# EAGLE board TrunkBus8 (EAGLE 7.5.0)
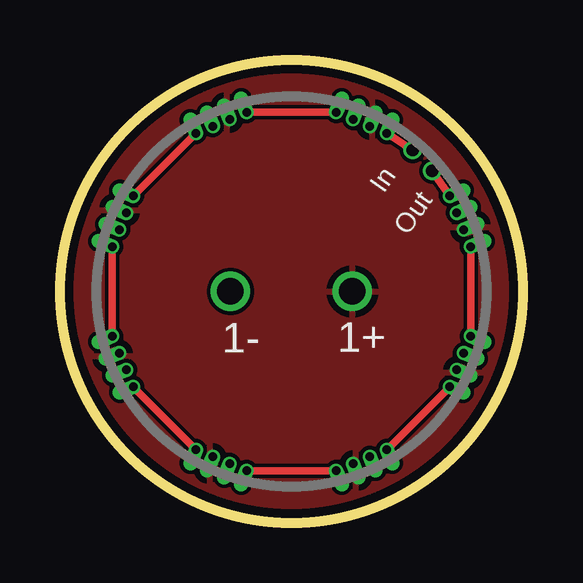
[diagram p0: board, top side]
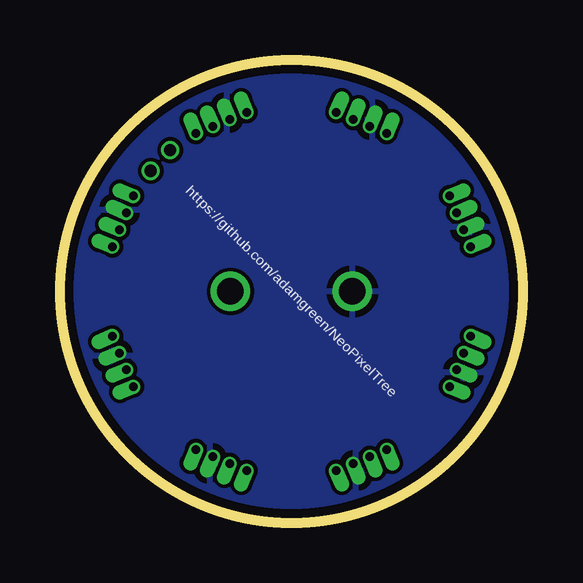
[diagram p1: board, bottom side, seen from below]

Size 19.3 x 19.3 mm. Coordinates in mm from the lower left corner, seen from the top.
Outline: circle at 9.65,9.65 radius 9.65
Copper layers (1*16): Top 0.035559375mm / dielectric 1.6mm / Bottom 0.035559375mm
Design rules "oshpark-2layer": minimum track width 6mil, minimum drill 10mil, track to track 6mil, track to pad 6mil, pad to pad 6mil, via to via 6mil, smd to smd 6mil, copper to edge 15mil, drill to drill 6mil, minimum pad ring 5mil, minimum via ring 5mil, stop-mask expansion 2.5mil, vias tented up to drill 0mil, thermal gap 10mil

## Footprints (pad centres in the part's own frame; a part is rotated, then mirrored left to right if it is on the bottom)
NEOPIXEL_TRUNK_2WIRE = drill 1.1: P$1 -2.54,0; P$2 2.54,0
NEOPIXEL_BRANCH_4WIRE = drill 0.356 pad 0.61 offset: P$1 -0.381,0; P$2 0.381,0; P$3 -1.143,0; P$4 1.143,0
NEOPIXEL_26AWG_HOLE = drill 0.508: P$1 0,0

## Placement (x,y rotation side)
E$1  [NEOPIXEL_TRUNK_2WIRE]  9.65,9.65 180 top
E$2  [NEOPIXEL_BRANCH_4WIRE]  16.69,12.57 112.5 top
E$3  [NEOPIXEL_BRANCH_4WIRE]  12.57,16.69 157.5 top
E$4  [NEOPIXEL_BRANCH_4WIRE]  6.73,16.69 202.5 top
E$5  [NEOPIXEL_BRANCH_4WIRE]  2.62,12.57 247.5 top
E$6  [NEOPIXEL_BRANCH_4WIRE]  2.62,6.73 292.5 top
E$7  [NEOPIXEL_BRANCH_4WIRE]  6.73,2.62 337.5 top
E$8  [NEOPIXEL_BRANCH_4WIRE]  12.57,2.62 22.5 top
E$10  [NEOPIXEL_BRANCH_4WIRE]  16.69,6.73 67.5 top
E$12  [NEOPIXEL_26AWG_HOLE]  15.52,14.68 0 top
E$13  [NEOPIXEL_26AWG_HOLE]  14.71,15.54 0 top

## Library data of the parts
E$1-E$8 E$10 E$12 E$13 = adam_custom

## Nets
5V: E$1.P$1 E$2.P$1 E$3.P$1 E$4.P$1 E$5.P$1 E$6.P$1 E$7.P$1 E$8.P$1 E$10.P$1
GND: E$1.P$2 E$2.P$2 E$3.P$2 E$4.P$2 E$5.P$2 E$6.P$2 E$7.P$2 E$8.P$2 E$10.P$2
S$1: E$8.P$4 E$10.P$3
S$3: E$2.P$4 E$12.P$1
S$4: E$3.P$3 E$13.P$1
S$5: E$3.P$4 E$4.P$3
S$6: E$4.P$4 E$5.P$3
S$7: E$5.P$4 E$6.P$3
S$8: E$6.P$4 E$7.P$3
S$9: E$2.P$3 E$10.P$4
S$10: E$7.P$4 E$8.P$3

## Tracks (layer width: path | path; a pad name or v marks a point on that pad's centre or on a via)
5V
  pour Top: 9.65,19.81 arc-90 19.81,9.65 arc-90 9.65,-0.51 arc-90 -0.51,9.65 arc-90
GND
  pour Bottom: 9.65,19.81 arc-90 19.81,9.65 arc-90 9.65,-0.51 arc-90 -0.51,9.65 arc-90
S$1
  Top 0.305: E$8.P$4 E$10.P$3
S$3
  Top 0.305: E$2.P$4 E$12.P$1
S$4
  Top 0.305: E$13.P$1 E$3.P$3
S$5
  Top 0.305: E$3.P$4 E$4.P$3
S$6
  Top 0.305: E$4.P$4 E$5.P$3
S$7
  Top 0.305: E$5.P$4 E$6.P$3
S$8
  Top 0.305: E$6.P$4 E$7.P$3
S$9
  Top 0.305: E$10.P$4 E$2.P$3
S$10
  Top 0.305: E$7.P$4 E$8.P$3

## Text on the board
tPlace: In | Out | 1- | 1+
bPlace: https://github.com/adamgreen/NeoPixelTree